# Altium PCB 万街灯火1.PcbDoc
Units mil, origin at the board's own origin, x right, y up, seen from the top; angles counter-clockwise.
Board outline 3360 x 3000 mil, 2 copper layers (Top Layer, Bottom Layer); 133 components, 66 nets, 270 pads, 0 vias.
Unrouted connection lines stored in the file: 64.
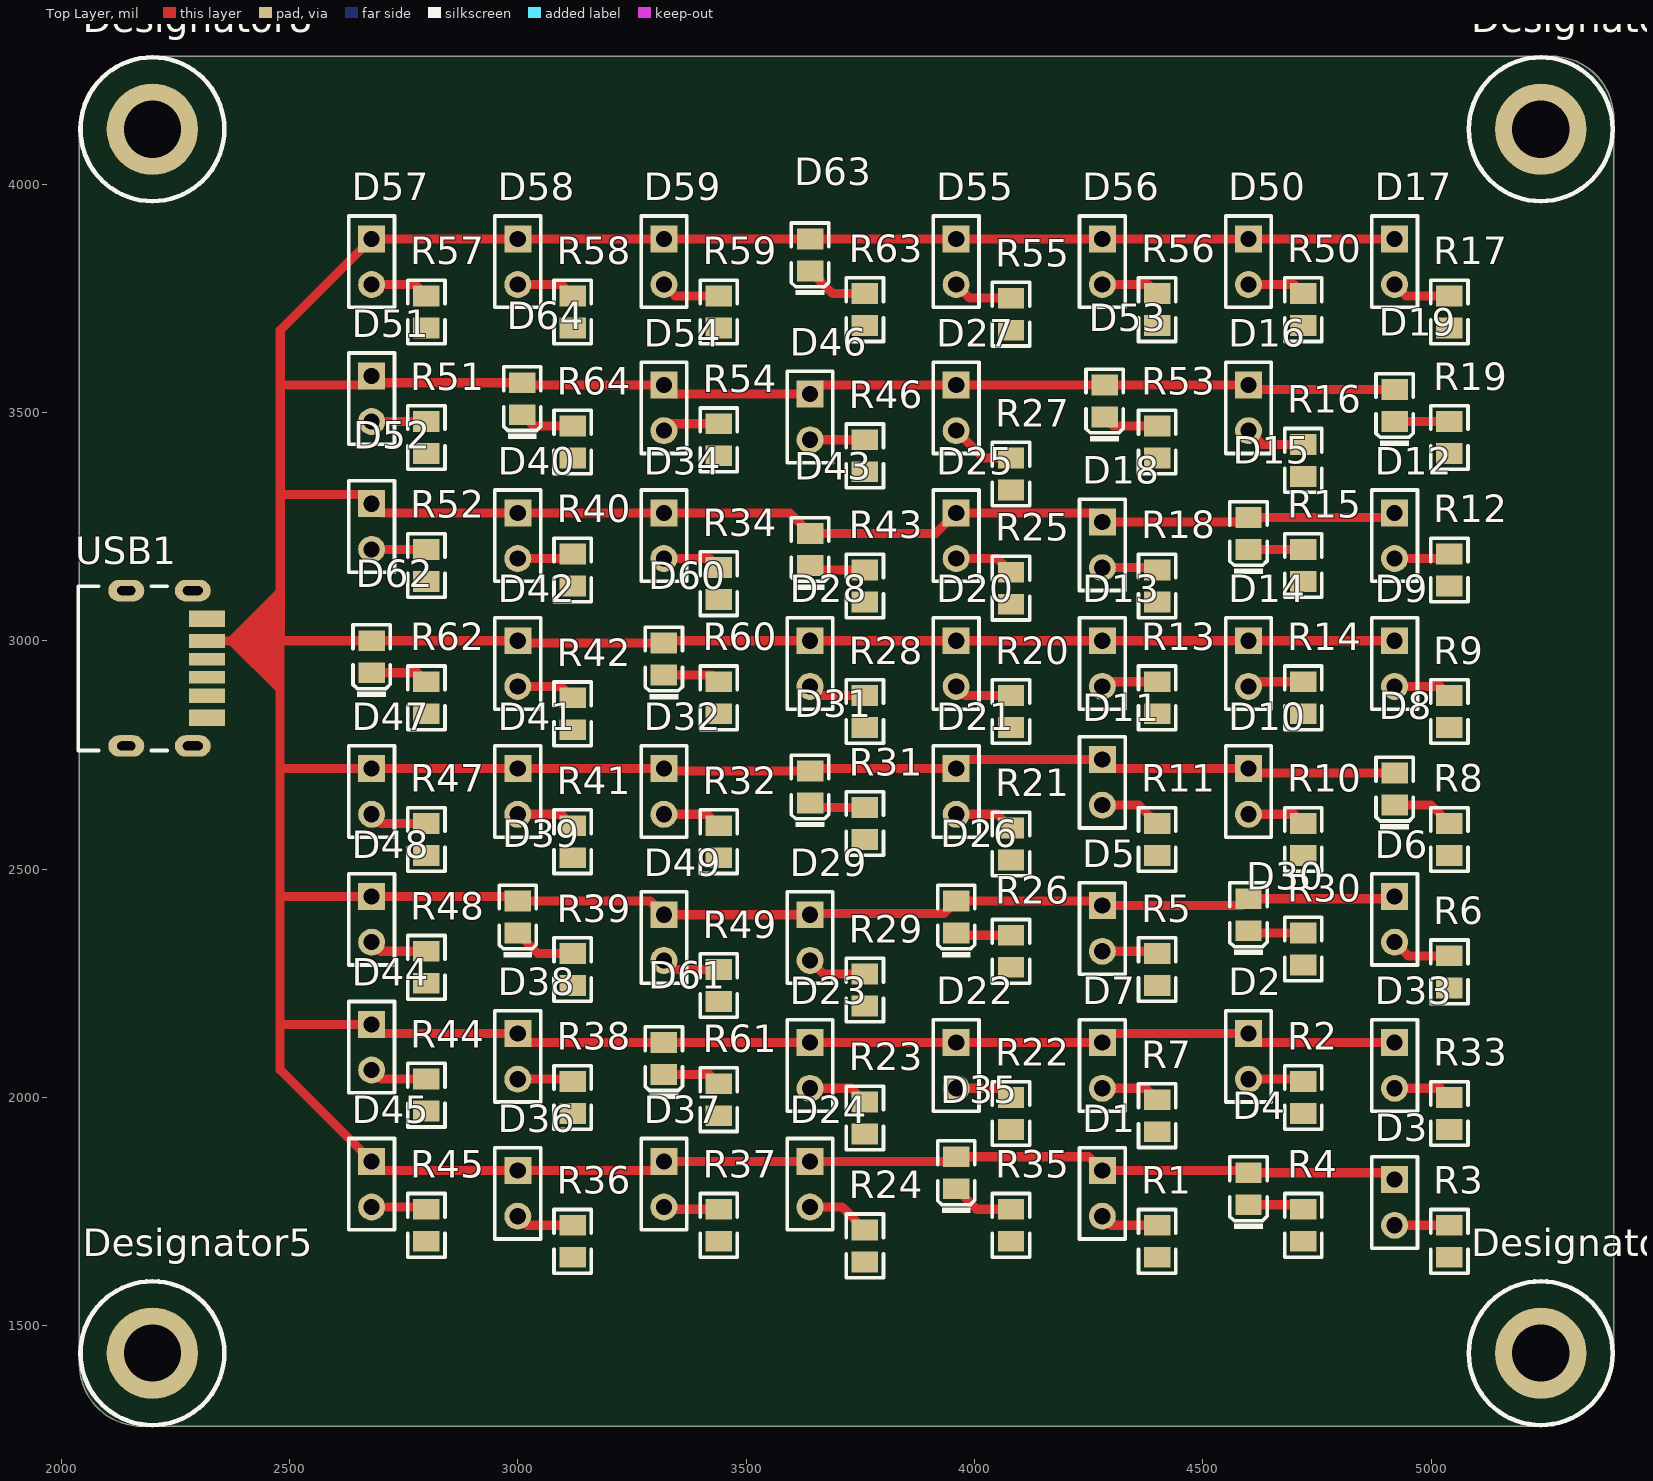
[diagram p0: Top Layer view]
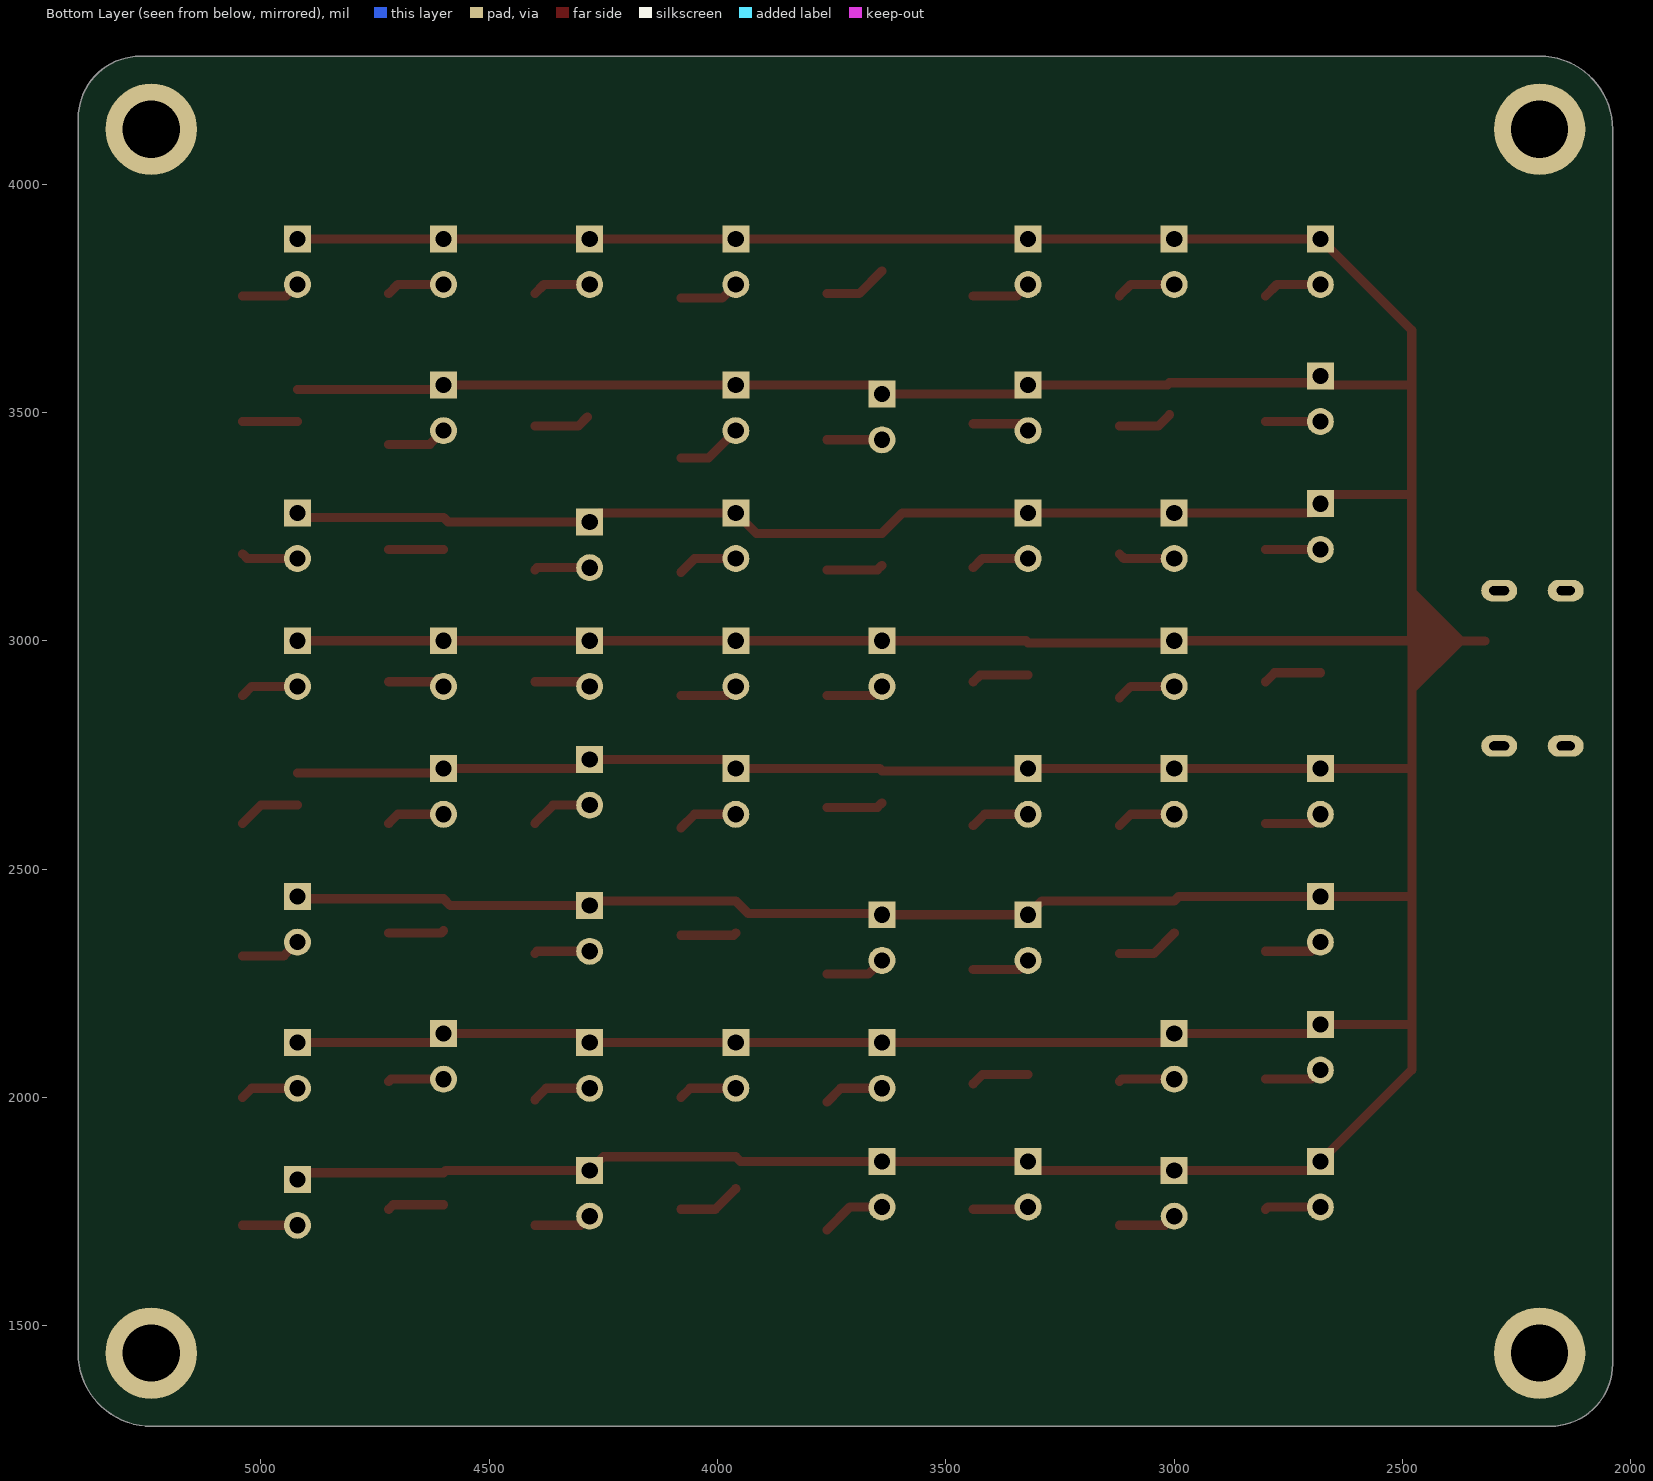
[diagram p1: Bottom Layer view, seen from below]
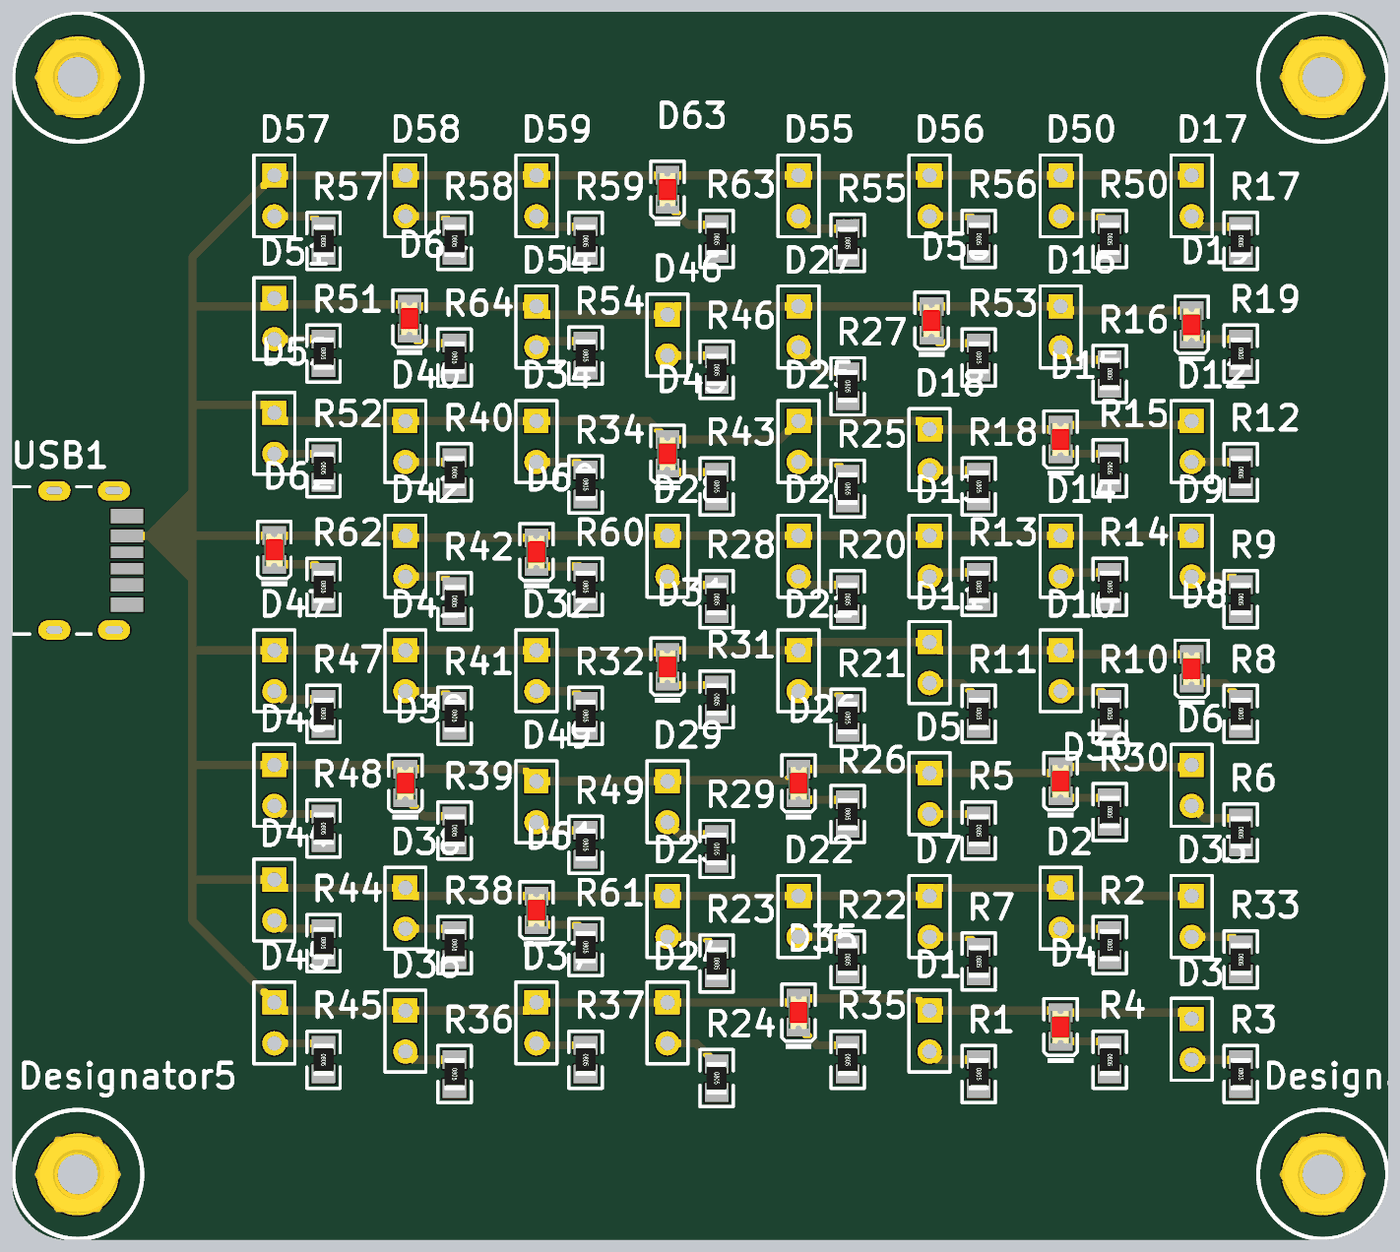
[diagram p2: 3D render of the assembled board from above, using the file's embedded part models]

## Layer stack, top to bottom
Top Solder: solder mask 0.4, Solder Resist, Dk 3.5
Top Layer: signal copper 1.4
Dielectric 1: dielectric 12.6, FR-4, Dk 4.8
Bottom Layer: signal copper 1.4
Bottom Solder: solder mask 0.4, Solder Resist, Dk 3.5

## Board outline
2040,1416.57 ccw(c2176.57,1416.57) 2176.57,1280 5240,1280 ccw(c5240,1440) 5400,1440 5400,4143.43 ccw(c5263.43,4143.43) 5263.43,4280 2200,4280 ccw(c2200,4120) 2040,4120
cut-out: 3800,4280

## Design rules (kind name [scope] priority, off if disabled: settings)
Clearance [All] p1: gap=10 ignorepadtopadclearanceinfootprint=FALSE except(0: Arc-Hole Track-Hole SMDPad-Hole THPad-Hole Via-Hole Fill-Hole Poly-Hole Region-Hole Text-Hole)
MinimumSolderMaskSliver [All] p1: minsoldermaskwidth=-10
PolygonConnect [All] p1: connectstyle=Relief reliefconductorwidth=20 reliefentries=4 polygonreliefangle="90 Angle" airgapwidth=10
RoutingVias [All] p1: holewidth=28 width=50 viastyle="Through Hole" minholewidth=28 minwidth=50 maxholewidth=28 maxwidth=50
SilkToSilkClearance [All] p1: silktosilkclearance=-10
SilkToSolderMaskClearance [IsPad] p1: minsilkscreentomaskgap=-10 clearancetoexposedcopper=TRUE
SolderMaskExpansion [All] p1: expansion=4
Width [All] p1: maxlimit=20 minlimit=10 preferedwidth=20 toplayer_minwidth=20 bottomlayer_maxwidth=10 bottomlayer_prefwidth=10 minimp=50.000000 maximp=50.000000 favimp=50.000000
27 further rules are at their usual default settings.

## Components (designator, comment, footprint, x,y, rotation, side; value= is the part's Value field where it differs from the comment)
D1 "LED1" HDR1X2 4280,1840 r270 top (schematic designator D?)
D2 "LED1" HDR1X2 4600,2140 r270 top
D3 "LED1" HDR1X2 4920,1820 r270 top
D4 "黄灯 0805" 0805_LED_S1 4600,1800 r90 top (schematic designator D?)
D5 "LED1" HDR1X2 4280,2420 r270 top
D6 "LED1" HDR1X2 4920,2440 r270 top
D7 "LED1" HDR1X2 4280,2120 r270 top
D8 "黄灯 0805" 0805_LED_S1 4920,2675.04 r90 top (schematic designator D?)
D9 "LED1" HDR1X2 4920,3000 r270 top
D10 "LED1" HDR1X2 4600,2720 r270 top
D11 "LED1" HDR1X2 4280,2740 r270 top
D12 "LED1" HDR1X2 4920,3280 r270 top
D13 "LED1" HDR1X2 4280,3000 r270 top
D14 "LED1" HDR1X2 4600,3000 r270 top
D15 "黄灯 0805" 0805_LED_S1 4600,3235.04 r90 top (schematic designator D?)
D16 "LED1" HDR1X2 4600,3560 r270 top
D17 "LED1" HDR1X2 4920,3880 r270 top
D18 "LED1" HDR1X2 4280,3260 r270 top
D19 "黄灯 0805" 0805_LED_S1 4920,3515.04 r90 top (schematic designator D?)
D20 "LED1" HDR1X2 3960,3000 r270 top
D21 "LED1" HDR1X2 3960,2720 r270 top
D22 "LED1" HDR1X2 3960,2120 r270 top
D23 "LED1" HDR1X2 3640,2120 r270 top
D24 "LED1" HDR1X2 3640,1860 r270 top
D25 "LED1" HDR1X2 3960,3280 r270 top
D26 "黄灯 0805" 0805_LED_S1 3960,2395.04 r90 top (schematic designator D?)
D27 "LED1" HDR1X2 3960,3560 r270 top
D28 "LED1" HDR1X2 3640,3000 r270 top
D29 "LED1" HDR1X2 3640,2400 r270 top
D30 "黄灯 0805" 0805_LED_S1 4600,2400 r90 top (schematic designator D?)
D31 "黄灯 0805" 0805_LED_S1 3640,2680 r90 top (schematic designator D?)
D32 "LED1" HDR1X2 3320,2720 r270 top
D33 "LED1" HDR1X2 4920,2120 r270 top
D34 "LED1" HDR1X2 3320,3280 r270 top
D35 "黄灯 0805" 0805_LED_S1 3960,1835.04 r90 top (schematic designator D?)
D36 "LED1" HDR1X2 3000,1840 r270 top
D37 "LED1" HDR1X2 3320,1860 r270 top
D38 "LED1" HDR1X2 3000,2140 r270 top
D39 "黄灯 0805" 0805_LED_S1 3000,2395.04 r90 top (schematic designator D?)
D40 "LED1" HDR1X2 3000,3280 r270 top
D41 "LED1" HDR1X2 3000,2720 r270 top
D42 "LED1" HDR1X2 3000,3000 r270 top
D43 "黄灯 0805" 0805_LED_S1 3640,3200 r90 top (schematic designator D?)
D44 "LED1" HDR1X2 2680,2160 r270 top
D45 "LED1" HDR1X2 2680,1860 r270 top
D46 "LED1" HDR1X2 3640,3540 r270 top
D47 "LED1" HDR1X2 2680,2720 r270 top
D48 "LED1" HDR1X2 2680,2440 r270 top
D49 "LED1" HDR1X2 3320,2400 r270 top
D50 "LED1" HDR1X2 4600,3880 r270 top
D51 "LED1" HDR1X2 2680,3580 r270 top
D52 "LED1" HDR1X2 2680,3300 r270 top
D53 "黄灯 0805" 0805_LED_S1 4285,3525.04 r90 top (schematic designator D?)
D54 "LED1" HDR1X2 3320,3560 r270 top
D55 "LED1" HDR1X2 3960,3880 r270 top
D56 "LED1" HDR1X2 4280,3880 r270 top
D57 "LED1" HDR1X2 2680,3880 r270 top
D58 "LED1" HDR1X2 3000,3880 r270 top
D59 "LED1" HDR1X2 3320,3880 r270 top
D60 "黄灯 0805" 0805_LED_S1 3320,2960 r90 top (schematic designator D?)
D61 "黄灯 0805" 0805_LED_S1 3320,2084.96 r90 top (schematic designator D?)
D62 "黄灯 0805" 0805_LED_S1 2680,2964.96 r90 top (schematic designator D?)
D63 "黄灯 0805" 0805_LED_S1 3640,3844.96 r90 top (schematic designator D?)
D64 "黄灯 0805" 0805_LED_S1 3010,3530 r90 top (schematic designator D?)
Designator5 "Comment" M3x4_L 2200,1440 r0 top
Designator6 "Comment" M3x4_L 5240,1440 r0 top
Designator7 "Comment" M3x4_L 5240,4120 r0 top
Designator8 "Comment" M3x4_L 2200,4120 r0 top
R1 "2Ω (2R00) ±1%" 0805_R 4400,1684.96 r270 top (schematic designator R?)
R2 "2Ω (2R00) ±1%" 0805_R 4720,2000 r270 top
R3 "2Ω (2R00) ±1%" 0805_R 5040,1684.96 r270 top
R4 "2Ω (2R00) ±1%" 0805_R 4720,1720 r270 top (schematic designator R?)
R5 "2Ω (2R00) ±1%" 0805_R 4400,2280 r270 top
R6 "2Ω (2R00) ±1%" 0805_R 5040,2275.04 r270 top
R7 "2Ω (2R00) ±1%" 0805_R 4400,1960 r270 top
R8 "2Ω (2R00) ±1%" 0805_R 5040,2564.96 r270 top (schematic designator R?)
R9 "2Ω (2R00) ±1%" 0805_R 5040,2844.96 r270 top
R10 "2Ω (2R00) ±1%" 0805_R 4720,2564.96 r270 top
R11 "2Ω (2R00) ±1%" 0805_R 4400,2564.96 r270 top
R12 "2Ω (2R00) ±1%" 0805_R 5040,3155.04 r270 top
R13 "2Ω (2R00) ±1%" 0805_R 4400,2875.04 r270 top
R14 "2Ω (2R00) ±1%" 0805_R 4720,2875.04 r270 top
R15 "2Ω (2R00) ±1%" 0805_R 4720,3164.96 r270 top (schematic designator R?)
R16 "2Ω (2R00) ±1%" 0805_R 4720,3395.04 r270 top
R17 "2Ω (2R00) ±1%" 0805_R 5040,3720 r270 top
R18 "2Ω (2R00) ±1%" 0805_R 4400,3120 r270 top
R19 "2Ω (2R00) ±1%" 0805_R 5040,3444.96 r270 top (schematic designator R?)
R20 "2Ω (2R00) ±1%" 0805_R 4080,2844.96 r270 top
R21 "2Ω (2R00) ±1%" 0805_R 4080,2555.04 r270 top
R22 "2Ω (2R00) ±1%" 0805_R 4080,1964.96 r270 top
R23 "2Ω (2R00) ±1%" 0805_R 3760,1955.04 r270 top
R24 "2Ω (2R00) ±1%" 0805_R 3760,1675.04 r270 top
R25 "2Ω (2R00) ±1%" 0805_R 4080,3115.04 r270 top
R26 "2Ω (2R00) ±1%" 0805_R 4080,2320 r270 top (schematic designator R?)
R27 "2Ω (2R00) ±1%" 0805_R 4080,3364.96 r270 top
R28 "2Ω (2R00) ±1%" 0805_R 3760,2844.96 r270 top
R29 "2Ω (2R00) ±1%" 0805_R 3760,2235.04 r270 top
R30 "2Ω (2R00) ±1%" 0805_R 4720,2324.96 r270 top (schematic designator R?)
R31 "2Ω (2R00) ±1%" 0805_R 3760,2600 r270 top (schematic designator R?)
R32 "2Ω (2R00) ±1%" 0805_R 3440,2560 r270 top
R33 "2Ω (2R00) ±1%" 0805_R 5040,1964.96 r270 top
R34 "2Ω (2R00) ±1%" 0805_R 3440,3124.96 r270 top
R35 "2Ω (2R00) ±1%" 0805_R 4080,1720 r270 top (schematic designator R?)
R36 "2Ω (2R00) ±1%" 0805_R 3120,1684.96 r270 top
R37 "2Ω (2R00) ±1%" 0805_R 3440,1720 r270 top
R38 "2Ω (2R00) ±1%" 0805_R 3120,2000 r270 top
R39 "2Ω (2R00) ±1%" 0805_R 3120,2280 r270 top (schematic designator R?)
R40 "2Ω (2R00) ±1%" 0805_R 3120,3155.04 r270 top
R41 "2Ω (2R00) ±1%" 0805_R 3120,2560 r270 top
R42 "2Ω (2R00) ±1%" 0805_R 3120,2840 r270 top
R43 "2Ω (2R00) ±1%" 0805_R 3760,3120 r270 top (schematic designator R?)
R44 "2Ω (2R00) ±1%" 0805_R 2800,2004.96 r270 top
R45 "2Ω (2R00) ±1%" 0805_R 2800,1720 r270 top
R46 "2Ω (2R00) ±1%" 0805_R 3760,3404.96 r270 top
R47 "2Ω (2R00) ±1%" 0805_R 2800,2564.96 r270 top
R48 "2Ω (2R00) ±1%" 0805_R 2800,2284.96 r270 top
R49 "2Ω (2R00) ±1%" 0805_R 3440,2244.96 r270 top
R50 "2Ω (2R00) ±1%" 0805_R 4720,3724.96 r270 top
R51 "2Ω (2R00) ±1%" 0805_R 2800,3444.96 r270 top
R52 "2Ω (2R00) ±1%" 0805_R 2800,3164.96 r270 top
R53 "2Ω (2R00) ±1%" 0805_R 4400,3435.04 r270 top (schematic designator R?)
R54 "2Ω (2R00) ±1%" 0805_R 3440,3440 r270 top
R55 "2Ω (2R00) ±1%" 0805_R 4080,3715.04 r270 top
R56 "2Ω (2R00) ±1%" 0805_R 4400,3724.96 r270 top
R57 "2Ω (2R00) ±1%" 0805_R 2800,3720 r270 top
R58 "2Ω (2R00) ±1%" 0805_R 3120,3720 r270 top
R59 "2Ω (2R00) ±1%" 0805_R 3440,3720 r270 top
R60 "2Ω (2R00) ±1%" 0805_R 3440,2875.04 r270 top (schematic designator R?)
R61 "2Ω (2R00) ±1%" 0805_R 3440,1995.04 r270 top (schematic designator R?)
R62 "2Ω (2R00) ±1%" 0805_R 2800,2875.04 r270 top (schematic designator R?)
R63 "2Ω (2R00) ±1%" 0805_R 3760,3724.96 r270 top (schematic designator R?)
R64 "2Ω (2R00) ±1%" 0805_R 3120,3435.04 r270 top (schematic designator R?)
USB1 "USB-C" USB-C/S_C 2042.44,2939.69 r270 top (schematic designator USB?)

## Footprints (in the part's own frame and the unit in brackets; to place one, negate y for a bottom-side part, rotate by r counter-clockwise, add the part's x,y. Pads: shape width x height; smd on the part's side, far side on the other; paste and mask are expansions set on the pad)
0805_LED_S1 [mm]
  rect 1.16x1.47 smd: A(0.89,0) K(-0.89,0)
  silkscreen extent -2.24,-1.04 1.77,1.03, body extent -1.01,-0.62 1.01,0.62, height 1.1
0805_R [mm]
  rect 1.16x1.47 smd: 1(-0.89,0) 2(0.89,0)
  silkscreen extent -1.77,-1.04 1.77,1.03, body extent -1,-0.62 1,0.63, height 0.49
HDR1X2 [mm] "Connector; Header; 2 Position"
  rect 1.5x1.5 hole 0.9: 1(0,0)
  round 1.5 hole 0.9: 2(2.54,0)
  silkscreen extent -1.27,-1.27 3.81,1.27
M3x4_L [mil] "M3铜柱，长：4mm"
  round 200 hole 125: 1(0,0)
  silkscreen extent -157,-157 157,157, body extent -106,-93 106,93, height 159
USB-C/S_C [mm] "Type-C 6P母座"
  oval 1.2x2 hole 0.5 slot 1.1 at 90 deg: 0(-4.32,6.25) 0(4.32,6.25)
  oval 1.2x2 hole 0.5 slot 1 at 90 deg: 0(-4.32,2.55) 0(4.32,2.55)
  rect 0.7x2 smd: A5(-0.5,7.05) B5(0.5,7.05)
  rect 0.8x2 smd: A9(1.52,7.05) B9(-1.52,7.05)
  rect 0.9x2 smd: A12(2.75,7.05) B12(-2.75,7.05)
  silkscreen extent -4.57,-0.13 4.57,4.83, body extent -4.47,0 4.48,7.05, height 3.16

## Part data
D1 D2 D3 D5 D6 D7 D9 D10 D11 D12 D13 D14 D16 D17 D18 D20 D21 D22 D23 D24 D25 D27 D28 D29 D32 D33 D34 D36 D37 D38 D40 D41 D42 D44 D45 D46 D47 D48 D49 D50 D51 D52 D54 D55 D56 D57 D58 D59: "Typical RED GaAs LED", LatestRevisionDate=08-Jul-2005, LatestRevisionNote="Mech Layer 1 removed.", PackageDescription="LED; 2 Leads", PackageReference=LED-1, Published=8-Jun-2000, Publisher="Altium Limited"
D4 D8 D15 D19 D26 D30 D31 D35 D39 D43 D53 D60 D61 D62 D63 D64: library part "0805 黄灯", "发光二极管", Package=0805, SuppliersPartNumber=C2296, ComponentLink1Description=供应, ComponentLink1URL=http://www.szlcsc.com/product/details_2669.html, Supplier=LC
R1 R2 R3 R4 R5 R6 R7 R8 R9 R10 R11 R12 R13 R14 R15 R16 R17 R18 R19 R20 R21 R22 R23 R24 R25 R26 R27 R28 R29 R30 R31 R32 R33 R34 R35 R36 R37 R38 R39 R40 R41 R42 R43 R44 R45 R46 R47 R48 R49 R50 R51 R52 R53 R54 R55 R56 R57 R58 R59 R60 R61 R62 R63 R64: library part "0805 2Ω (2R00) 1%", "贴片电阻", Package=0805, SuppliersPartNumber=C17606, ComponentLink1Description=供应, ComponentLink1URL=http://www.szlcsc.com/product/details_18294.html, Supplier=LC
USB1: library part USB-C_6P/S, "USB-C_6P型母接口", BOM名称=USB-CÐ

## Nets (pads, with @x,y where several pads share a name; then routed paths per layer and width w, separated by ;. In a path a pad name is that pad's centre, name@x,y a point inside that pad or via, vN(x,y) a via of type N, cw(c..) or ccw(c..) an arc to the next point about the centre after c; other vN are vias at no path point)
B9: D1.1 D2.1 D3.1 D4.A D5.1 D6.1 D7.1 D8.A D9.1 D10.1 D11.1 D12.1 D13.1 D14.1 D15.A D16.1 D17.1 D18.1 D19.A D20.1 D21.1 D22.1 D23.1 D24.1 D25.1 D26.A D27.1 D28.1 D29.1 D30.A D31.A D32.1 D33.1 D34.1 D35.A D36.1 D37.1 D38.1 D39.A D40.1 D41.1 D42.1 D43.A D44.1 D45.1 D46.1 D47.1 D48.1 D49.1 D50.1 D51.1 D52.1 D53.A D54.1 D55.1 D56.1 D57.1 D58.1 D59.1 D60.A D61.A D62.A D63.A D64.A USB1.B9 | length 21721.5
  Top Layer w20: USB1.B9 2479.53,2999.53 ; D3.1 4904.96,1835.04 D4.A 4595.04,1840 D1.1 4249.92,1870.08 D35.A 3949.92,1860 D24.1 D37.1 3300,1840 D36.1 2700,1840 D45.1 2479.53,2060.47 2479.53,2160 ; D33.1 4620,2120 D2.1 4300,2140 D7.1 D22.1 D23.1 D61.A 3020,2120 D38.1 2700,2140 D44.1 2479.53,2160 ; D6.1 4915.04,2435.04 D30.A 4584.96,2420 D5.1 4269.92,2430.08 D26.A 3932.76,2402.83 3640,2402.83 D29.1 D49.1 3289.92,2430.08 D39.A 2990.08,2440 D48.1 2479.53,2440 ; D8.A 4609.92,2710.08 D10.1 4300,2720 D11.1 3980,2740 D21.1 3644.96,2720 D31.A 3324.96,2715.04 D32.1 D41.1 D47.1 2479.76,2720 2479.53,2719.76 ; D9.1 D14.1 D13.1 D20.1 D28.1 3324.96,3000 D60.A 3004.96,2995.04 D42.1 D62.A 2480,3000 ; D12.1 4910.08,3270.08 D15.A 4589.92,3260 D18.1 4260,3280 D25.1 3915.04,3235.04 D43.A 3595.04,3280 D34.1 D40.1 2700,3280 D52.1 2660,3320 2480,3320 ; D19.A 4609.92,3550.08 D16.1 4285.08,3560 D53.A 3960.08,3560.08 D27.1 3660,3560 D46.1 3340,3540 D54.1 3015.04,3560 D64.A 2694.96,3565.04 D51.1 2660,3560 2480,3560 ; D17.1 D50.1 D56.1 D55.1 D63.A D59.1 D58.1 D57.1 2480,3680 2480,3560 ; 2479.53,2160 2479.53,2440 ; 2479.53,2440 2479.53,2719.76 ; 2479.53,2719.76 2479.53,2999.53 ; 2479.53,2999.53 2480,3000 ; 2480,3000 2480,3320 ; 2480,3320 2480,3560
GND: R1.2 R2.2 R3.2 R4.2 R5.2 R6.2 R7.2 R8.2 R9.2 R10.2 R11.2 R12.2 R13.2 R14.2 R15.2 R16.2 R17.2 R18.2 R19.2 R20.2 R21.2 R22.2 R23.2 R24.2 R25.2 R26.2 R27.2 R28.2 R29.2 R30.2 R31.2 R32.2 R33.2 R34.2 R35.2 R36.2 R37.2 R38.2 R39.2 R40.2 R41.2 R42.2 R43.2 R44.2 R45.2 R46.2 R47.2 R48.2 R49.2 R50.2 R51.2 R52.2 R53.2 R54.2 R55.2 R56.2 R57.2 R58.2 R59.2 R60.2 R61.2 R62.2 R63.2 R64.2 USB1.B12
NetD1_2: D1.2 R1.1 | length 128.3
  Top Layer w20: D1.2 4300,1720 R1.1
NetD2_2: D2.2 R2.1 | length 122.1
  Top Layer w20: D2.2 4715.04,2040 R2.1
NetD3_2: D3.2 R3.1 | length 120
  Top Layer w20: D3.2 R3.1
NetD4_K: D4.K R4.1 | length 124.1
  Top Layer w20: D4.K 4710.08,1764.96 R4.1
NetD5_2: D5.2 R5.1 | length 122.1
  Top Layer w20: D5.2 4395.04,2320 R5.1
NetD6_2: D6.2 R6.1 | length 132.4
  Top Layer w20: D6.2 4949.92,2310.08 R6.1
NetD7_2: D7.2 R7.1 | length 130.3
  Top Layer w20: D7.2 4375.04,2020 R7.1
NetD8_K: D8.K R8.1 | length 136.6
  Top Layer w20: D8.K 5000,2640 R8.1
NetD9_2: D9.2 R9.1 | length 128.3
  Top Layer w20: D9.2 5020,2900 R9.1
NetD10_2: D10.2 R10.1 | length 128.3
  Top Layer w20: D10.2 4700,2620 R10.1
NetD11_2: D11.2 R11.1 | length 136.6
  Top Layer w20: D11.2 4360,2640 R11.1
NetD12_2: D12.2 R12.1 | length 124.2
  Top Layer w20: D12.2 5029.92,3180 R12.1
NetD13_2: D13.2 R13.1 | length 124.2
  Top Layer w20: D13.2 4290.08,2910.08 R13.1
NetD14_2: D14.2 R14.1 | length 124.2
  Top Layer w20: D14.2 4610.08,2910.08 R14.1
NetD15_K: D15.K R15.1 | length 120
  Top Layer w20: D15.K R15.1
NetD16_2: D16.2 R16.1 | length 132.4
  Top Layer w20: D16.2 4629.92,3430.08 R16.1
NetD17_2: D17.2 R17.1 | length 130.3
  Top Layer w20: D17.2 4944.96,3755.04 R17.1
NetD18_2: D18.2 R18.1 | length 122.1
  Top Layer w20: D18.2 4395.04,3160 R18.1
NetD19_K: D19.K R19.1 | length 120
  Top Layer w20: D19.K R19.1
NetD20_2: D20.2 R20.1 | length 128.3
  Top Layer w20: D20.2 3980,2880 R20.1
NetD21_2: D21.2 R21.1 | length 132.4
  Top Layer w20: D21.2 4050.08,2620 R21.1
NetD22_2: D22.2 R22.1 | length 128.3
  Top Layer w20: D22.2 4060,2020 R22.1
NetD23_2: D23.2 R23.1 | length 132.4
  Top Layer w20: D23.2 3730.08,2020 R23.1
NetD24_2: D24.2 R24.1 | length 140.7
  Top Layer w20: D24.2 3710.08,1760 R24.1
NetD25_2: D25.2 R25.1 | length 132.4
  Top Layer w20: D25.2 4050.08,3180 R25.1
NetD26_K: D26.K R26.1 | length 122.1
  Top Layer w20: D26.K 3964.96,2355.04 R26.1
NetD27_2: D27.2 R27.1 | length 144.9
  Top Layer w20: D27.2 4020,3400 R27.1
NetD28_2: D28.2 R28.1 | length 128.3
  Top Layer w20: D28.2 3660,2880 R28.1
NetD29_2: D29.2 R29.1 | length 132.4
  Top Layer w20: D29.2 3669.92,2270.08 R29.1
NetD30_K: D30.K R30.1 | length 122.1
  Top Layer w20: D30.K 4604.96,2360 R30.1
NetD31_K: D31.K R31.1 | length 124.1
  Top Layer w20: D31.K 3649.92,2635.04 R31.1
NetD32_2: D32.2 R32.1 | length 130.3
  Top Layer w20: D32.2 3415.04,2620 R32.1
NetD33_2: D33.2 R33.1 | length 128.3
  Top Layer w20: D33.2 5020,2020 R33.1
NetD34_2: D34.2 R34.1 | length 128.3
  Top Layer w20: D34.2 3420,3180 R34.1
NetD35_K: D35.K R35.1 | length 138.6
  Top Layer w20: D35.K 4004.96,1755.04 R35.1
NetD36_2: D36.2 R36.1 | length 128.3
  Top Layer w20: D36.2 3020,1720 R36.1
NetD37_2: D37.2 R37.1 | length 122.1
  Top Layer w20: D37.2 3324.96,1755.04 R37.1
NetD38_2: D38.2 R38.1 | length 122.1
  Top Layer w20: D38.2 3115.04,2040 R38.1
NetD39_K: D39.K R39.1 | length 138.6
  Top Layer w20: D39.K 3044.96,2315.04 R39.1
NetD40_2: D40.2 R40.1 | length 124.2
  Top Layer w20: D40.2 3109.92,3180 R40.1
NetD41_2: D41.2 R41.1 | length 130.3
  Top Layer w20: D41.2 3095.04,2620 R41.1
NetD42_2: D42.2 R42.1 | length 130.3
  Top Layer w20: D42.2 3095.04,2900 R42.1
NetD43_K: D43.K R43.1 | length 124.1
  Top Layer w20: D43.K 3649.92,3155.04 R43.1
NetD44_2: D44.2 R44.1 | length 128.3
  Top Layer w20: D44.2 2700,2040 R44.1
NetD45_2: D45.2 R45.1 | length 122.1
  Top Layer w20: D45.2 2795.04,1760 R45.1
NetD46_2: D46.2 R46.1 | length 120
  Top Layer w20: D46.2 R46.1
NetD47_2: D47.2 R47.1 | length 128.3
  Top Layer w20: D47.2 2700,2600 R47.1
NetD48_2: D48.2 R48.1 | length 128.3
  Top Layer w20: D48.2 2700,2320 R48.1
NetD49_2: D49.2 R49.1 | length 128.3
  Top Layer w20: D49.2 3340,2280 R49.1
NetD50_2: D50.2 R50.1 | length 128.3
  Top Layer w20: D50.2 4700,3780 R50.1
NetD51_2: D51.2 R51.1 | length 120
  Top Layer w20: D51.2 R51.1
NetD52_2: D52.2 R52.1 | length 120
  Top Layer w20: D52.2 R52.1
NetD53_K: D53.K R53.1 | length 123.3
  Top Layer w20: D53.K 4304.92,3470.08 R53.1
NetD54_2: D54.2 R54.1 | length 126.2
  Top Layer w20: D54.2 3335.04,3475.04 R54.1
NetD55_2: D55.2 R55.1 | length 132.4
  Top Layer w20: D55.2 3989.92,3750.08 R55.1
NetD56_2: D56.2 R56.1 | length 128.3
  Top Layer w20: D56.2 4380,3780 R56.1
NetD57_2: D57.2 R57.1 | length 130.3
  Top Layer w20: D57.2 2775.04,3780 R57.1
NetD58_2: D58.2 R58.1 | length 130.3
  Top Layer w20: D58.2 3095.04,3780 R58.1
NetD59_2: D59.2 R59.1 | length 130.3
  Top Layer w20: D59.2 3344.96,3755.04 R59.1
NetD60_K: D60.K R60.1 | length 126.2
  Top Layer w20: D60.K 3425.12,2924.96 R60.1
NetD61_K: D61.K R61.1 | length 128.2
  Top Layer w20: D61.K 3420.16,2049.92 R61.1
NetD62_K: D62.K R62.1 | length 128.2
  Top Layer w20: D62.K 2780.16,2929.92 R62.1
NetD63_K: D63.K R63.1 | length 140.7
  Top Layer w20: D63.K 3689.92,3760 R63.1
NetD64_K: D64.K R64.1 | length 120.3
  Top Layer w20: D64.K 3034.88,3470.08 R64.1
pads on no net: Designator5.1 Designator6.1 Designator7.1 Designator8.1 USB1.0 USB1.A5 USB1.A9 USB1.A12 USB1.B5

## Other copper
Top Layer:
  region: 2400,3080
  region net B9: 2479.53,2880 2479.53,2880.47 2360,3000 2480,3120
  region net B9: 2479.53,2920 2400,2999.53 2360,2999.53 2360,3000 2480,3120
  region net B9: 2480,3160

## Silkscreen, mask and mechanical layers (free items; w line width, h text height)
Mechanical 1:
  lines w9.9: 5353.67,4246.33 5339.47,4257.23 5323.96,4266.18 5307.42,4273.03 5290.13,4277.66 5272.38,4280 5263.43,4280 ; 5366.33,4233.67 5377.23,4219.47 5386.18,4203.96 5393.03,4187.42 5397.66,4170.13 5400,4152.38 5400,4143.43 ; 2040,1416.57 ccw(c2176.57,1416.57) 2176.57,1280 ; 2040,1416.57 2040,4120 ; 2040,1416.57 2040,1407.62 2042.34,1389.87 2046.97,1372.58 2053.82,1356.04 2062.77,1340.53 2073.67,1326.33 2086.33,1313.67 2100.53,1302.77 2116.04,1293.82 2132.58,1286.97 2149.87,1282.34 2167.62,1280 2176.57,1280 ; 2040,1416.57 2040,4120 ; 2040,4120 cw(c2200,4120) 2200,4280 ; 2040,4120 2040,4130.49 2042.74,4151.28 2048.17,4171.54 2056.19,4190.92 2066.68,4209.08 2079.45,4225.72 2094.28,4240.55 2110.92,4253.32 2129.08,4263.81 2148.46,4271.83 2168.72,4277.26 2189.51,4280 2200,4280 ; 2176.57,1280 5240,1280 ; 2176.57,1280 5240,1280 ; 2200,4280 2200,4280 ; 5240,1280 ccw(c5240,1440) 5400,1440 ; 5240,1280 5250.49,1280 5271.28,1282.74 5291.54,1288.17 5310.92,1296.19 5329.08,1306.68 5345.72,1319.45 5360.55,1334.28 5373.32,1350.92 5383.81,1369.08 5391.83,1388.46 5397.26,1408.72 5400,1429.51 5400,1440 ; 5263.43,4280 5263.43,4280 ; 5400,1440 5400,4143.43 ; 5400,1440 5400,4143.43 ; 5400,1440 5400,1440
  lines w10: 2120,640 5710,640 ccw(c5710,690) 5760,690 ; 2200,4280 ccw(c2200,4120) 2040,4120 2040,1416.57 ccw(c2176.57,1416.57) 2176.57,1280 5240,1280 ccw(c5240,1440) 5400,1440 5400,4143.43 ; 4920,640 2090,640 cw(c2090,690) 2040,690 2040,4440 2040,4470 cw(c2090,4470) 2090,4520 5710,4520 cw(c5710,4470) 5760,4470 ; 5760,680 5840,720 5840,4470